# EAGLE board schematic (EAGLE 9.7.0)

Size 129.6 x 167.71 mm. Coordinates in mm from the lower left corner, seen from the top.
Outline: 0,0 129.6,0 129.6,167.71 0,167.71 0,0
Copper layers (1*16): Top 0.035mm / dielectric 1.5mm / Bottom 0.035mm
Design rules "default": minimum track width 6mil, minimum drill 0.35mm, track to track 6mil, track to pad 6mil, pad to pad 6mil, via to via 6mil, smd to smd 6mil, copper to edge 40mil, drill to drill 6mil, minimum pad ring 10mil, minimum via ring 8mil, stop-mask expansion 4mil, vias tented up to drill 0mil, thermal gap 10mil

## Footprints (pad centres in the part's own frame; a part is rotated, then mirrored left to right if it is on the bottom)
LEDRD254W60D565H860B = drill 0.981 pad 1.581: 1 -1.27,0; 2 1.27,0
RESAD1016W63L850D250B = drill 0.83 pad 1.43: 1 -5.08,0; 2 5.08,0
HA-06-SM065 = drill 1 pad 1.676: 1 -2.54,-2.54; 2 0,2.54; 3 2.54,-2.54
SWITCH-MOMENTARY-PTH-6.5MM = drill 1.016 pad 1.88: 1 -3.251,2.261; 2 3.251,2.261; 3 -3.251,-2.261; 4 3.251,-2.261
SWITCH-SPDT-PTH-8.5X3.7MM = drill 1.016 pad 1.88: 1 -2.54,0; 2 0,0; 3 2.54,0
ARDUINO-UNO-R3-SHIELD = drill 1.016 pad 1.88: 3.3V 24.13,-2.54; 5V 24.13,0; A0 24.13,12.7; A1 24.13,15.24; A2 24.13,17.78; A3 24.13,20.32; A4 24.13,22.86; A5 24.13,25.4; AREF -24.13,-13.97; D2 -24.13,20.32; D3 -24.13,17.78; D4 -24.13,15.24; D5 -24.13,12.7; D6 -24.13,10.16; D7 -24.13,7.62; D8 -24.13,3.81; D9 -24.13,1.27; D10 -24.13,-1.27; D11 -24.13,-3.81; D12 -24.13,-6.35; D13 -24.13,-8.89; GND@0 24.13,2.54; GND@1 24.13,5.08; GND@2 -24.13,-11.43; IOREF 24.13,-7.62; NC 24.13,-10.16; RES 24.13,-5.08; RX -24.13,25.4; SCL -24.13,-19.05; SDA -24.13,-16.51; TX -24.13,22.86; VIN 24.13,7.62

## Placement (x,y rotation side)
D1  RED  [LEDRD254W60D565H860B]  120.84,153.11 180 top
D2  RED  [LEDRD254W60D565H860B]  108.14,153.11 180 top
D3  RED  [LEDRD254W60D565H860B]  95.44,153.11 180 top
D4  RED  [LEDRD254W60D565H860B]  82.74,153.11 180 top
D5  RED  [LEDRD254W60D565H860B]  70.04,153.11 180 top
R1  1k  [RESAD1016W63L850D250B]  15.88,26.42 0 top
R2  1k  [RESAD1016W63L850D250B]  71.75,28.96 0 top
R3  1k  [RESAD1016W63L850D250B]  26.04,28.96 0 top
R4  1k  [RESAD1016W63L850D250B]  36.2,26.42 0 top
R5  1k  [RESAD1016W63L850D250B]  46.35,28.96 0 top
RPOT2  250k  [HA-06-SM065]  92.08,23.88 0 top
RPOT4  250k  [HA-06-SM065]  107.31,23.88 0 top
RPOT5  250k  [HA-06-SM065]  122.56,23.88 0 top
S1  SWITCH_MOMENTARY  [SWITCH-MOMENTARY-PTH-6.5MM]  8.26,7.37 90 top
S2  SWITCH_MOMENTARY  [SWITCH-MOMENTARY-PTH-6.5MM]  18.41,7.37 90 top
S3  SWITCH_MOMENTARY  [SWITCH-MOMENTARY-PTH-6.5MM]  28.57,7.37 90 top
S4  SWITCH_MOMENTARY  [SWITCH-MOMENTARY-PTH-6.5MM]  38.73,7.37 90 top
S5  SWITCH_MOMENTARY  [SWITCH-MOMENTARY-PTH-6.5MM]  48.9,7.37 90 top
S6  TOGGLE  [SWITCH-SPDT-PTH-8.5X3.7MM]  122.11,160.73 0 top
S7  TOGGLE  [SWITCH-SPDT-PTH-8.5X3.7MM]  109.41,160.73 0 top
S8  TOGGLE  [SWITCH-SPDT-PTH-8.5X3.7MM]  96.71,160.73 0 top
S9  TOGGLE  [SWITCH-SPDT-PTH-8.5X3.7MM]  84.01,160.73 0 top
S10  TOGGLE  [SWITCH-SPDT-PTH-8.5X3.7MM]  71.31,160.73 0 top
U1  ARDUINO-UNO-R3-SHIELD  [ARDUINO-UNO-R3-SHIELD]  52.96,98.17 270 top

## Library data of the parts
D1-D5 = Tinkercad; CATEGORY: Opto-Electronic; SUB-CATEGORY: LED; VALUE: LED_RED
R1-R5 RPOT2 RPOT4 RPOT5 S1-S10 U1 = Tinkercad

## Nets
S2_3: R1.2 R3.1 S2.3 S2.4
S3_3: R3.2 R4.1 S3.3 S3.4
S4_4: R4.2 R5.1 S4.3 S4.4
S5_3: R5.2 S5.3 S5.4
U1_3.3V: S6.3 S7.3 S8.3 S9.3 S10.3 U1.3.3V
U1_5V: R1.1 R2.2 RPOT2.3 RPOT4.1 RPOT4.3 RPOT5.1 RPOT5.3 S1.1 S1.2 S1.3 S1.4 S2.1 S2.2 S3.1 S3.2 S4.1 S4.2 S5.1 S5.2 U1.5V
U1_A0: R2.1 U1.A0
U1_A1: RPOT2.2 U1.A1
U1_A2: RPOT4.2 U1.A2
U1_A3: RPOT5.2 U1.A3
U1_D2: D3.1 S8.2 U1.D2
U1_D3: D4.1 S9.2 U1.D3
U1_D4: D5.1 S10.2 U1.D4
U1_GND: D1.2 D2.2 D3.2 D4.2 D5.2 RPOT2.1 S6.1 S7.1 S8.1 S9.1 S10.1 U1.GND@0 U1.GND@1 U1.GND@2
U1_RX: D1.1 S6.2 U1.RX
U1_TX: D2.1 S7.2 U1.TX

## Tracks (layer width: path | path; a pad name or v marks a point on that pad's centre or on a via)
S2_3  (3 unrouted)
S3_3  (3 unrouted)
S4_4  (3 unrouted)
S5_3  (2 unrouted)
U1_3.3V  (5 unrouted)
U1_5V  (19 unrouted)
U1_A0  (1 unrouted)
U1_A1  (1 unrouted)
U1_A2  (1 unrouted)
U1_A3  (1 unrouted)
U1_D2  (2 unrouted)
U1_D3  (2 unrouted)
U1_D4  (2 unrouted)
U1_GND  (13 unrouted)
U1_RX  (2 unrouted)
U1_TX  (2 unrouted)